# EAGLE board panel (EAGLE 5.10)
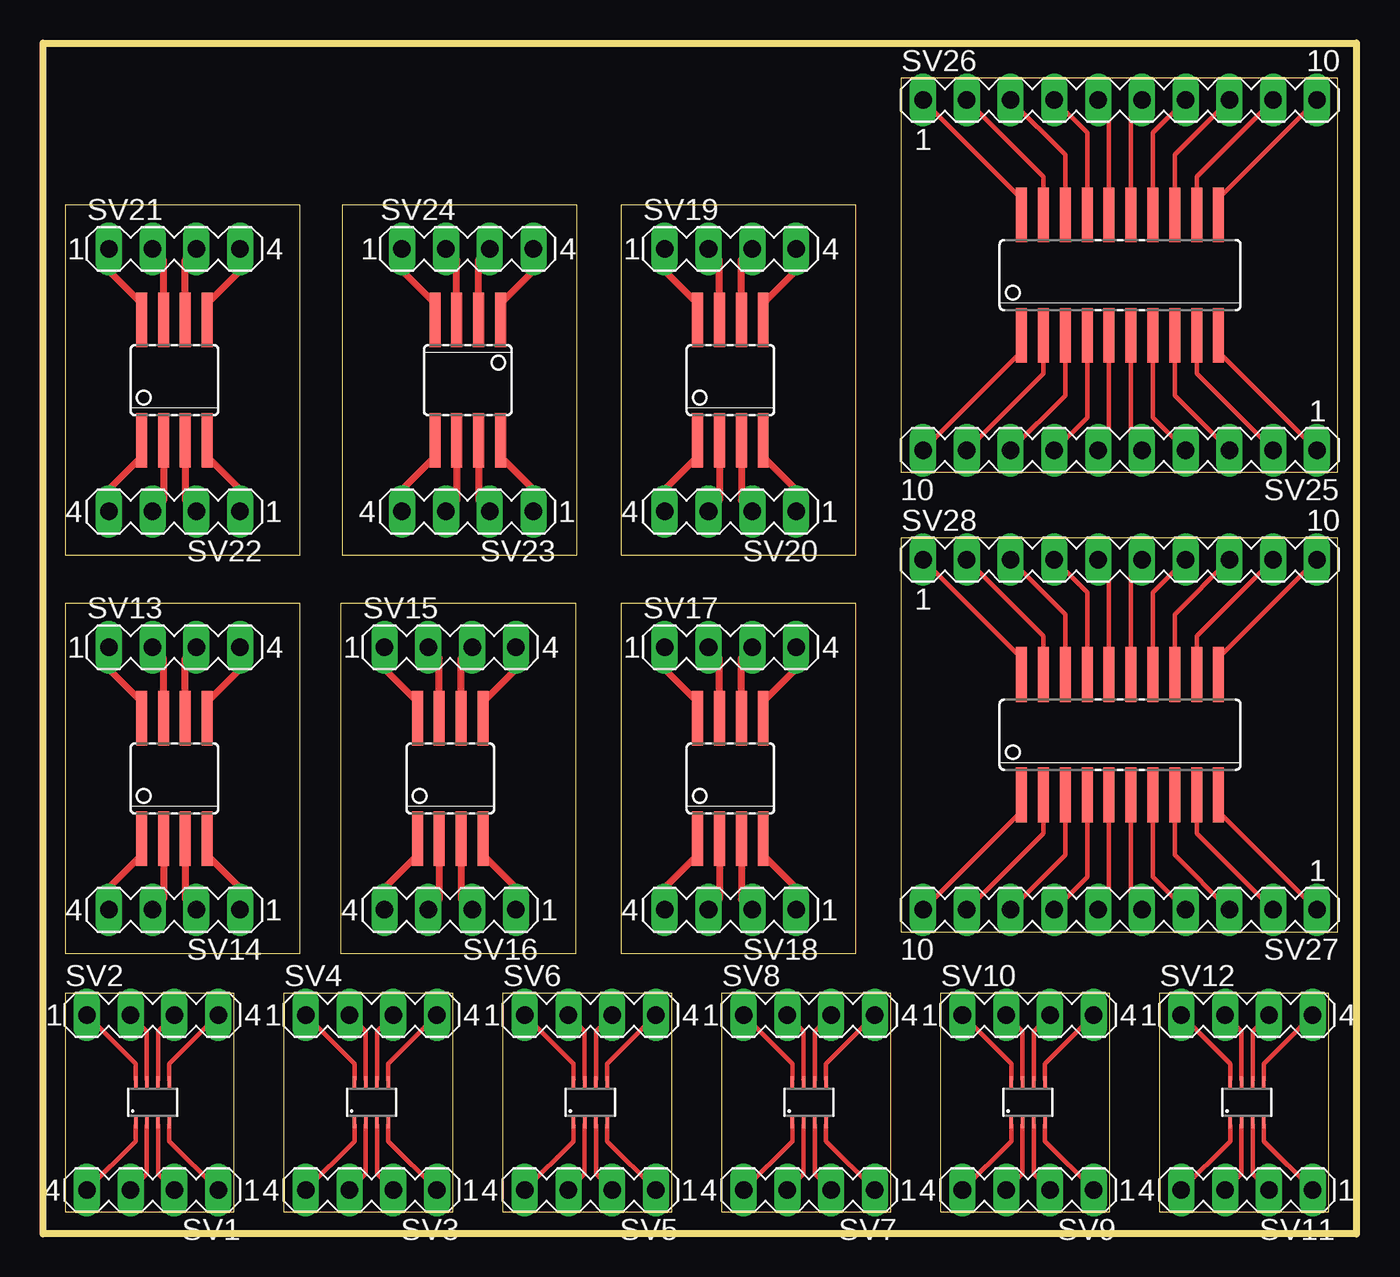
[diagram p0: board, top side]

Size 76.2 x 69.09 mm. Coordinates in mm from the lower left corner, seen from the top.
Outline: 1.27,1.27 11.1,1.27 11.1,13.96 1.27,13.96 1.27,1.27
Outline: 13.97,1.27 23.8,1.27 23.8,13.96 13.97,13.96 13.97,1.27
Outline: 26.67,1.27 36.5,1.27 36.5,13.96 26.67,13.96 26.67,1.27
Outline: 39.37,1.27 49.2,1.27 49.2,13.96 39.37,13.96 39.37,1.27
Outline: 52.07,1.27 61.9,1.27 61.9,13.96 52.07,13.96 52.07,1.27
Outline: 0,0 0,69.09 76.2,69.09 76.2,0 0,0
Outline: 64.77,1.27 74.6,1.27 74.6,13.96 64.77,13.96 64.77,1.27
Outline: 1.27,16.26 14.91,16.26 14.91,36.57 1.27,36.57 1.27,16.26
Outline: 17.27,16.26 30.91,16.26 30.91,36.57 17.27,36.57 17.27,16.26
Outline: 33.53,16.26 47.17,16.26 47.17,36.57 33.53,36.57 33.53,16.26
Outline: 33.53,39.37 47.17,39.37 47.17,59.68 33.53,59.68 33.53,39.37
Outline: 1.27,39.37 14.91,39.37 14.91,59.68 1.27,59.68 1.27,39.37
Outline: 30.99,59.69 17.35,59.69 17.35,39.38 30.99,39.38 30.99,59.69
Outline: 49.78,44.2 75.11,44.2 75.11,67.05 49.78,67.05 49.78,44.2
Outline: 49.78,17.53 75.11,17.53 75.11,40.38 49.78,40.38 49.78,17.53
Copper layers (1*16): Top 0.035mm / dielectric 1.5mm / Bottom 0.035mm
Design rules "default": minimum track width 10mil, minimum drill 24mil, track to track 8mil, track to pad 8mil, pad to pad 8mil, via to via 8mil, smd to smd 8mil, copper to edge 40mil, drill to drill 8mil, minimum pad ring 10mil, minimum via ring 8mil, stop-mask expansion 4mil, vias tented up to drill 0mil, thermal gap 10mil

## Footprints (pad centres in the part's own frame; a part is rotated, then mirrored left to right if it is on the bottom)
MA04-1 = drill 1.016 long: 1 -3.81,0; 2 -1.27,0; 3 1.27,0; 4 3.81,0
MA10-1 = drill 1.016 long: 1 -11.43,0; 2 -8.89,0; 3 -6.35,0; 4 -3.81,0; 5 -1.27,0; 6 1.27,0; 7 3.81,0; 8 6.35,0; 9 8.89,0; 10 11.43,0
SOT23-8 = smd 0.203 x 0.406: 1 -0.975,-1.3; 2 -0.325,-1.3; 3 0.325,-1.3; 4 0.975,-1.3; 5 0.975,1.3; 6 0.325,1.3; 7 -0.325,1.3; 8 -0.975,1.3; P$3 -0.975,0.975; P$4 0.325,0.975; P$7 -0.325,0.975; P$8 0.975,0.975; P$9 -0.975,-0.975; P$10 -0.325,-0.975; P$11 0.325,-0.975; P$12 0.975,-0.975
SOIC_8_UNI = smd 0.635 x 1.27: 1 -1.905,-4.445; 2 -0.635,-4.445; 3 0.635,-4.445; 4 1.905,-4.445; 5 1.905,4.445; 6 0.635,4.445; 7 -0.635,4.445; 8 -1.905,4.445; P$5 1.905,-2.54; P$6 0.635,-2.54; P$8 -0.635,-3.81; P$10 -1.905,-2.54; P$11 -1.905,-3.81; P$13 0.635,-3.81; P$15 1.905,-3.175; P$17 0.635,-2.54; P$18 -0.635,-2.54; P$19 -1.905,2.54; P$20 -0.635,2.54; P$21 0.635,2.54; P$22 1.905,2.54; P$23 1.905,3.175; P$24 0.635,3.175; P$25 -0.635,3.175; P$26 -1.905,3.175
SOIC_20_UNI = smd 0.635 x 1.27: 1 -5.715,-4.445; 2 -4.445,-4.445; 3 -3.175,-4.445; 4 -1.905,-4.445; 5 -0.635,-4.445; 6 0.635,-4.445; 7 1.905,-4.445; 8 3.175,-4.445; 9 4.445,-4.445; 10 5.715,-4.445; 11 5.715,4.445; 12 4.445,4.445; 13 3.175,4.445; 14 1.905,4.445; 15 0.635,4.445; 16 -0.635,4.445; 17 -1.905,4.445; 18 -3.175,4.445; 19 -4.445,4.445; 20 -5.715,4.445; P$3 -1.905,2.54; P$4 -1.905,3.175; P$6 -0.635,3.81; P$7 -0.635,2.54; P$8 0.635,2.54; P$9 0.635,3.81; P$12 1.905,3.175; P$13 1.905,2.54; P$14 -1.905,-2.54; P$15 -1.905,-3.81; P$18 -0.635,-3.81; P$19 -0.635,-2.54; P$20 0.635,-2.54; P$21 0.635,-3.81; P$24 1.905,-3.175; P$25 1.905,-2.54; P$29 5.715,2.54; P$30 5.715,3.175; P$31 4.445,3.175; P$32 4.445,2.54; P$33 3.175,2.54; P$34 3.175,3.175; P$35 3.175,-2.54; P$36 3.175,-3.81; P$39 4.445,-3.175; P$40 4.445,-2.54; P$41 5.715,-2.54; P$42 5.715,-3.175; P$45 -3.175,3.175; P$46 -3.175,2.54; P$47 -3.175,-2.54; P$48 -3.175,-3.175; P$51 -4.445,-3.175; P$52 -4.445,-2.54; P$53 -5.715,-2.54; P$54 -5.715,-3.81; P$57 -4.445,3.175; P$58 -4.445,2.54; P$60 -5.715,3.175; P$61 -5.715,2.54

## Placement (x,y rotation side)
SV1  [MA04-1]  6.35,2.54 180 top
SV2  [MA04-1]  6.35,12.7 0 top
SV3  [MA04-1]  19.05,2.54 180 top
SV4  [MA04-1]  19.05,12.7 0 top
SV5  [MA04-1]  31.75,2.54 180 top
SV6  [MA04-1]  31.75,12.7 0 top
SV7  [MA04-1]  44.45,2.54 180 top
SV8  [MA04-1]  44.45,12.7 0 top
SV9  [MA04-1]  57.15,2.54 180 top
SV10  [MA04-1]  57.15,12.7 0 top
SV11  [MA04-1]  69.85,2.54 180 top
SV12  [MA04-1]  69.85,12.7 0 top
SV13  [MA04-1]  7.62,34.04 0 top
SV14  [MA04-1]  7.62,18.8 180 top
SV15  [MA04-1]  23.62,34.04 0 top
SV16  [MA04-1]  23.62,18.8 180 top
SV17  [MA04-1]  39.88,34.04 0 top
SV18  [MA04-1]  39.88,18.8 180 top
SV19  [MA04-1]  39.88,57.15 0 top
SV20  [MA04-1]  39.88,41.91 180 top
SV21  [MA04-1]  7.62,57.15 0 top
SV22  [MA04-1]  7.62,41.91 180 top
SV23  [MA04-1]  24.64,41.91 180 top
SV24  [MA04-1]  24.64,57.15 0 top
SV25  [MA10-1]  62.48,45.47 180 top
SV26  [MA10-1]  62.48,65.79 0 top
SV27  [MA10-1]  62.48,18.8 180 top
SV28  [MA10-1]  62.48,39.12 0 top
U$1  SOT23-8  [SOT23-8]  6.35,7.62 0 top
U$2  SOT23-8  [SOT23-8]  19.05,7.62 0 top
U$3  SOT23-8  [SOT23-8]  31.75,7.62 0 top
U$4  SOT23-8  [SOT23-8]  44.45,7.62 0 top
U$5  SOT23-8  [SOT23-8]  57.15,7.62 0 top
U$6  SOT23-8  [SOT23-8]  69.85,7.62 0 top
U$7  SOIC_8_UNI  [SOIC_8_UNI]  7.62,26.42 0 top
U$8  SOIC_8_UNI  [SOIC_8_UNI]  23.62,26.42 0 top
U$9  SOIC_8_UNI  [SOIC_8_UNI]  39.88,26.42 0 top
U$10  SOIC_8_UNI  [SOIC_8_UNI]  39.88,49.53 0 top
U$11  SOIC_8_UNI  [SOIC_8_UNI]  7.62,49.53 0 top
U$12  SOIC_8_UNI  [SOIC_8_UNI]  24.64,49.53 180 top
U$13  SOIC_20_UNI  [SOIC_20_UNI]  62.48,55.63 0 top
U$14  SOIC_20_UNI  [SOIC_20_UNI]  62.48,28.96 0 top

## Library data of the parts
SV1-SV28 = con-lstb
U$1-U$14 = custom

## Nets
N$1: SV1.4 U$1.1
N$2: SV1.3 U$1.2
N$3: SV1.2 U$1.3
N$4: SV1.1 U$1.4
N$5: SV2.4 U$1.5
N$6: SV2.3 U$1.6
N$7: SV2.2 U$1.7
N$8: SV2.1 U$1.8
N$9: SV3.4 U$2.1
N$10: SV3.3 U$2.2
N$11: SV3.2 U$2.3
N$12: SV3.1 U$2.4
N$13: SV4.4 U$2.5
N$14: SV4.3 U$2.6
N$15: SV4.2 U$2.7
N$16: SV4.1 U$2.8
N$17: SV5.4 U$3.1
N$18: SV5.3 U$3.2
N$19: SV5.2 U$3.3
N$20: SV5.1 U$3.4
N$21: SV6.4 U$3.5
N$22: SV6.3 U$3.6
N$23: SV6.2 U$3.7
N$24: SV6.1 U$3.8
N$25: SV7.4 U$4.1
N$26: SV7.3 U$4.2
N$27: SV7.2 U$4.3
N$28: SV7.1 U$4.4
N$29: SV8.4 U$4.5
N$30: SV8.3 U$4.6
N$31: SV8.2 U$4.7
N$32: SV8.1 U$4.8
N$33: SV9.4 U$5.1
N$34: SV9.3 U$5.2
N$35: SV9.2 U$5.3
N$36: SV9.1 U$5.4
N$37: SV10.4 U$5.5
N$38: SV10.3 U$5.6
N$39: SV10.2 U$5.7
N$40: SV10.1 U$5.8
N$41: SV11.4 U$6.1
N$42: SV11.3 U$6.2
N$43: SV11.2 U$6.3
N$44: SV11.1 U$6.4
N$45: SV12.4 U$6.5
N$46: SV12.3 U$6.6
N$47: SV12.2 U$6.7
N$48: SV12.1 U$6.8
N$49: SV13.4 U$7.5
N$50: SV13.3 U$7.6
N$51: SV13.2 U$7.7
N$52: SV13.1 U$7.8
N$53: SV14.3 U$7.2
N$54: SV14.2 U$7.3
N$55: SV14.1 U$7.4
N$56: SV14.4 U$7.1
N$57: SV15.4 U$8.5
N$58: SV15.3 U$8.6
N$59: SV15.2 U$8.7
N$60: SV15.1 U$8.8
N$61: SV16.3 U$8.2
N$62: SV16.2 U$8.3
N$63: SV16.1 U$8.4
N$64: SV16.4 U$8.1
N$65: SV17.4 U$9.5
N$66: SV17.3 U$9.6
N$67: SV17.2 U$9.7
N$68: SV17.1 U$9.8
N$69: SV18.3 U$9.2
N$70: SV18.2 U$9.3
N$71: SV18.1 U$9.4
N$72: SV18.4 U$9.1
N$73: SV19.4 U$10.5
N$74: SV19.3 U$10.6
N$75: SV19.2 U$10.7
N$76: SV19.1 U$10.8
N$77: SV20.3 U$10.2
N$78: SV20.2 U$10.3
N$79: SV20.1 U$10.4
N$80: SV20.4 U$10.1
N$81: SV21.4 U$11.5
N$82: SV21.3 U$11.6
N$83: SV21.2 U$11.7
N$84: SV21.1 U$11.8
N$85: SV22.3 U$11.2
N$86: SV22.2 U$11.3
N$87: SV22.1 U$11.4
N$88: SV22.4 U$11.1
N$89: SV23.4 U$12.5
N$90: SV23.3 U$12.6
N$91: SV23.2 U$12.7
N$92: SV23.1 U$12.8
N$93: SV24.3 U$12.2
N$94: SV24.2 U$12.3
N$95: SV24.1 U$12.4
N$96: SV24.4 U$12.1
N$97: SV25.10 U$13.1
N$98: SV25.9 U$13.2
N$99: SV25.8 U$13.3
N$100: SV25.7 U$13.4
N$101: SV25.6 U$13.5
N$102: SV25.5 U$13.6
N$103: SV25.4 U$13.7
N$104: SV25.3 U$13.8
N$105: SV25.2 U$13.9
N$106: SV25.1 U$13.10
N$107: SV26.10 U$13.11
N$108: SV26.9 U$13.12
N$109: SV26.8 U$13.13
N$110: SV26.7 U$13.14
N$111: SV26.6 U$13.15
N$112: SV26.5 U$13.16
N$113: SV26.4 U$13.17
N$114: SV26.3 U$13.18
N$115: SV26.2 U$13.19
N$116: SV26.1 U$13.20
N$117: SV27.10 U$14.1
N$118: SV27.9 U$14.2
N$119: SV27.8 U$14.3
N$120: SV27.7 U$14.4
N$121: SV27.6 U$14.5
N$122: SV27.5 U$14.6
N$123: SV27.4 U$14.7
N$124: SV27.3 U$14.8
N$125: SV27.2 U$14.9
N$126: SV27.1 U$14.10
N$127: SV28.10 U$14.11
N$128: SV28.9 U$14.12
N$129: SV28.8 U$14.13
N$130: SV28.7 U$14.14
N$131: SV28.6 U$14.15
N$132: SV28.5 U$14.16
N$133: SV28.4 U$14.17
N$134: SV28.3 U$14.18
N$135: SV28.2 U$14.19
N$136: SV28.1 U$14.20

## Tracks (layer width: path | path; a pad name or v marks a point on that pad's centre or on a via)
N$1
  Top 0.254: U$1.1 5.38,5.38 SV1.4
N$2
  Top 0.254: U$1.2 6.03,3.48 SV1.3
N$3
  Top 0.254: U$1.3 6.67,3.48 SV1.2
N$4
  Top 0.254: U$1.4 7.33,5.38 SV1.1
N$5
  Top 0.254: U$1.5 7.33,9.87 SV2.4
N$6
  Top 0.254: U$1.6 6.67,11.76 SV2.3
N$7
  Top 0.254: U$1.7 6.03,11.76 SV2.2
N$8
  Top 0.254: U$1.8 5.38,9.87 SV2.1
N$9
  Top 0.254: U$2.1 18.07,5.38 SV3.4
N$10
  Top 0.254: U$2.2 18.73,3.48 SV3.3
N$11
  Top 0.254: U$2.3 19.38,3.48 SV3.2
N$12
  Top 0.254: U$2.4 20.02,5.38 SV3.1
N$13
  Top 0.254: U$2.5 20.02,9.87 SV4.4
N$14
  Top 0.254: U$2.6 19.38,11.76 SV4.3
N$15
  Top 0.254: U$2.7 18.73,11.76 SV4.2
N$16
  Top 0.254: U$2.8 18.07,9.87 SV4.1
N$17
  Top 0.254: U$3.1 30.77,5.38 SV5.4
N$18
  Top 0.254: U$3.2 31.43,3.48 SV5.3
N$19
  Top 0.254: U$3.3 32.08,3.48 SV5.2
N$20
  Top 0.254: U$3.4 32.73,5.38 SV5.1
N$21
  Top 0.254: U$3.5 32.73,9.87 SV6.4
N$22
  Top 0.254: U$3.6 32.08,11.76 SV6.3
N$23
  Top 0.254: U$3.7 31.43,11.76 SV6.2
N$24
  Top 0.254: U$3.8 30.77,9.87 SV6.1
N$25
  Top 0.254: U$4.1 43.48,5.38 SV7.4
N$26
  Top 0.254: U$4.2 44.12,3.48 SV7.3
N$27
  Top 0.254: U$4.3 44.77,3.48 SV7.2
N$28
  Top 0.254: U$4.4 45.42,5.38 SV7.1
N$29
  Top 0.254: U$4.5 45.42,9.87 SV8.4
N$30
  Top 0.254: U$4.6 44.77,11.76 SV8.3
N$31
  Top 0.254: U$4.7 44.12,11.76 SV8.2
N$32
  Top 0.254: U$4.8 43.48,9.87 SV8.1
N$33
  Top 0.254: U$5.1 56.17,5.38 SV9.4
N$34
  Top 0.254: U$5.2 56.83,3.48 SV9.3
N$35
  Top 0.254: U$5.3 57.48,3.48 SV9.2
N$36
  Top 0.254: U$5.4 58.12,5.38 SV9.1
N$37
  Top 0.254: U$5.5 58.12,9.87 SV10.4
N$38
  Top 0.254: U$5.6 57.48,11.76 SV10.3
N$39
  Top 0.254: U$5.7 56.83,11.76 SV10.2
N$40
  Top 0.254: U$5.8 56.17,9.87 SV10.1
N$41
  Top 0.254: U$6.1 68.88,5.38 SV11.4
N$42
  Top 0.254: U$6.2 69.53,3.48 SV11.3
N$43
  Top 0.254: U$6.3 70.17,3.48 SV11.2
N$44
  Top 0.254: U$6.4 70.83,5.38 SV11.1
N$45
  Top 0.254: U$6.5 70.83,9.87 SV12.4
N$46
  Top 0.254: U$6.6 70.17,11.76 SV12.3
N$47
  Top 0.254: U$6.7 69.53,11.76 SV12.2
N$48
  Top 0.254: U$6.8 68.88,9.87 SV12.1
N$49
  Top 0.406: U$7.5 11.43,32.77 SV13.4
N$50
  Top 0.406: U$7.6 8.26,33.4 SV13.3
N$51
  Top 0.406: U$7.7 6.99,33.4 SV13.2
N$52
  Top 0.406: U$7.8 3.81,32.77 SV13.1
N$53
  Top 0.406: U$7.2 6.99,19.43 SV14.3
N$54
  Top 0.406: U$7.3 8.26,19.43 SV14.2
N$55
  Top 0.406: U$7.4 11.43,20.07 SV14.1
N$56
  Top 0.406: U$7.1 3.81,20.07 SV14.4
N$57
  Top 0.406: U$8.5 27.43,32.77 SV15.4
N$58
  Top 0.406: U$8.6 24.26,33.4 SV15.3
N$59
  Top 0.406: U$8.7 22.99,33.4 SV15.2
N$60
  Top 0.406: U$8.8 19.81,32.77 SV15.1
N$61
  Top 0.406: U$8.2 22.99,19.43 SV16.3
N$62
  Top 0.406: U$8.3 24.26,19.43 SV16.2
N$63
  Top 0.406: U$8.4 27.43,20.07 SV16.1
N$64
  Top 0.406: U$8.1 19.81,20.07 SV16.4
N$65
  Top 0.406: U$9.5 43.69,32.77 SV17.4
N$66
  Top 0.406: U$9.6 40.51,33.4 SV17.3
N$67
  Top 0.406: U$9.7 39.24,33.4 SV17.2
N$68
  Top 0.406: U$9.8 36.07,32.77 SV17.1
N$69
  Top 0.406: U$9.2 39.24,19.43 SV18.3
N$70
  Top 0.406: U$9.3 40.51,19.43 SV18.2
N$71
  Top 0.406: U$9.4 43.69,20.07 SV18.1
N$72
  Top 0.406: U$9.1 36.07,20.07 SV18.4
N$73
  Top 0.406: U$10.5 43.69,55.88 SV19.4
N$74
  Top 0.406: U$10.6 40.51,56.52 SV19.3
N$75
  Top 0.406: U$10.7 39.24,56.52 SV19.2
N$76
  Top 0.406: U$10.8 36.07,55.88 SV19.1
N$77
  Top 0.406: U$10.2 39.24,42.55 SV20.3
N$78
  Top 0.406: U$10.3 40.51,42.55 SV20.2
N$79
  Top 0.406: U$10.4 43.69,43.18 SV20.1
N$80
  Top 0.406: U$10.1 36.07,43.18 SV20.4
N$81
  Top 0.406: U$11.5 11.43,55.88 SV21.4
N$82
  Top 0.406: U$11.6 8.26,56.52 SV21.3
N$83
  Top 0.406: U$11.7 6.99,56.52 SV21.2
N$84
  Top 0.406: U$11.8 3.81,55.88 SV21.1
N$85
  Top 0.406: U$11.2 6.99,42.55 SV22.3
N$86
  Top 0.406: U$11.3 8.26,42.55 SV22.2
N$87
  Top 0.406: U$11.4 11.43,43.18 SV22.1
N$88
  Top 0.406: U$11.1 3.81,43.18 SV22.4
N$89
  Top 0.406: U$12.5 20.83,43.18 SV23.4
N$90
  Top 0.406: U$12.6 24,42.55 SV23.3
N$91
  Top 0.406: U$12.7 25.27,42.55 SV23.2
N$92
  Top 0.406: U$12.8 28.45,43.18 SV23.1
N$93
  Top 0.406: U$12.2 25.27,56.52 SV24.3
N$94
  Top 0.406: U$12.3 24,56.52 SV24.2
N$95
  Top 0.406: U$12.4 20.83,55.88 SV24.1
N$96
  Top 0.406: U$12.1 28.45,55.88 SV24.4
N$97
  Top 0.254: U$13.1 SV25.10
N$98
  Top 0.254: U$13.2 58.04,49.91 SV25.9
N$99
  Top 0.254: U$13.3 59.31,48.64 SV25.8
N$100
  Top 0.254: U$13.4 60.58,47.37 SV25.7
N$101
  Top 0.254: U$13.5 61.85,46.1 SV25.6
N$102
  Top 0.254: U$13.6 63.12,46.1 SV25.5
N$103
  Top 0.254: U$13.7 64.39,47.37 SV25.4
N$104
  Top 0.254: U$13.8 65.66,48.64 SV25.3
N$105
  Top 0.254: U$13.9 66.93,49.91 SV25.2
N$106
  Top 0.254: U$13.10 SV25.1
N$107
  Top 0.254: U$13.11 SV26.10
N$108
  Top 0.254: U$13.12 66.93,61.34 SV26.9
N$109
  Top 0.254: U$13.13 65.66,62.61 SV26.8
N$110
  Top 0.254: U$13.14 64.39,63.88 SV26.7
N$111
  Top 0.254: U$13.15 63.12,65.15 SV26.6
N$112
  Top 0.254: U$13.16 61.85,65.15 SV26.5
N$113
  Top 0.254: U$13.17 60.58,63.88 SV26.4
N$114
  Top 0.254: U$13.18 59.31,62.61 SV26.3
N$115
  Top 0.254: U$13.19 58.04,61.34 SV26.2
N$116
  Top 0.254: U$13.20 SV26.1
N$117
  Top 0.254: U$14.1 SV27.10
N$118
  Top 0.254: U$14.2 58.04,23.24 SV27.9
N$119
  Top 0.254: U$14.3 59.31,21.97 SV27.8
N$120
  Top 0.254: U$14.4 60.58,20.7 SV27.7
N$121
  Top 0.254: U$14.5 61.85,19.43 SV27.6
N$122
  Top 0.254: U$14.6 63.12,19.43 SV27.5
N$123
  Top 0.254: U$14.7 64.39,20.7 SV27.4
N$124
  Top 0.254: U$14.8 65.66,21.97 SV27.3
N$125
  Top 0.254: U$14.9 66.93,23.24 SV27.2
N$126
  Top 0.254: U$14.10 SV27.1
N$127
  Top 0.254: U$14.11 SV28.10
N$128
  Top 0.254: U$14.12 66.93,34.67 SV28.9
N$129
  Top 0.254: U$14.13 65.66,35.94 SV28.8
N$130
  Top 0.254: U$14.14 64.39,37.21 SV28.7
N$131
  Top 0.254: U$14.15 63.12,38.48 SV28.6
N$132
  Top 0.254: U$14.16 61.85,38.48 SV28.5
N$133
  Top 0.254: U$14.17 60.58,37.21 SV28.4
N$134
  Top 0.254: U$14.18 59.31,35.94 SV28.3
N$135
  Top 0.254: U$14.19 58.04,34.67 SV28.2
N$136
  Top 0.254: U$14.20 SV28.1